# Altium PCB EEG_photoresistor.PcbDoc
Units mm, origin at the board's own origin, x right, y up, seen from the top; angles counter-clockwise.
Board outline 42.26 x 42.26 mm, 2 copper layers (Top Layer, Bottom Layer), stack 1.4 mm thick; 15 components, 8 nets, 46 pads, 0 vias.
Unrouted connection lines stored in the file: 2.
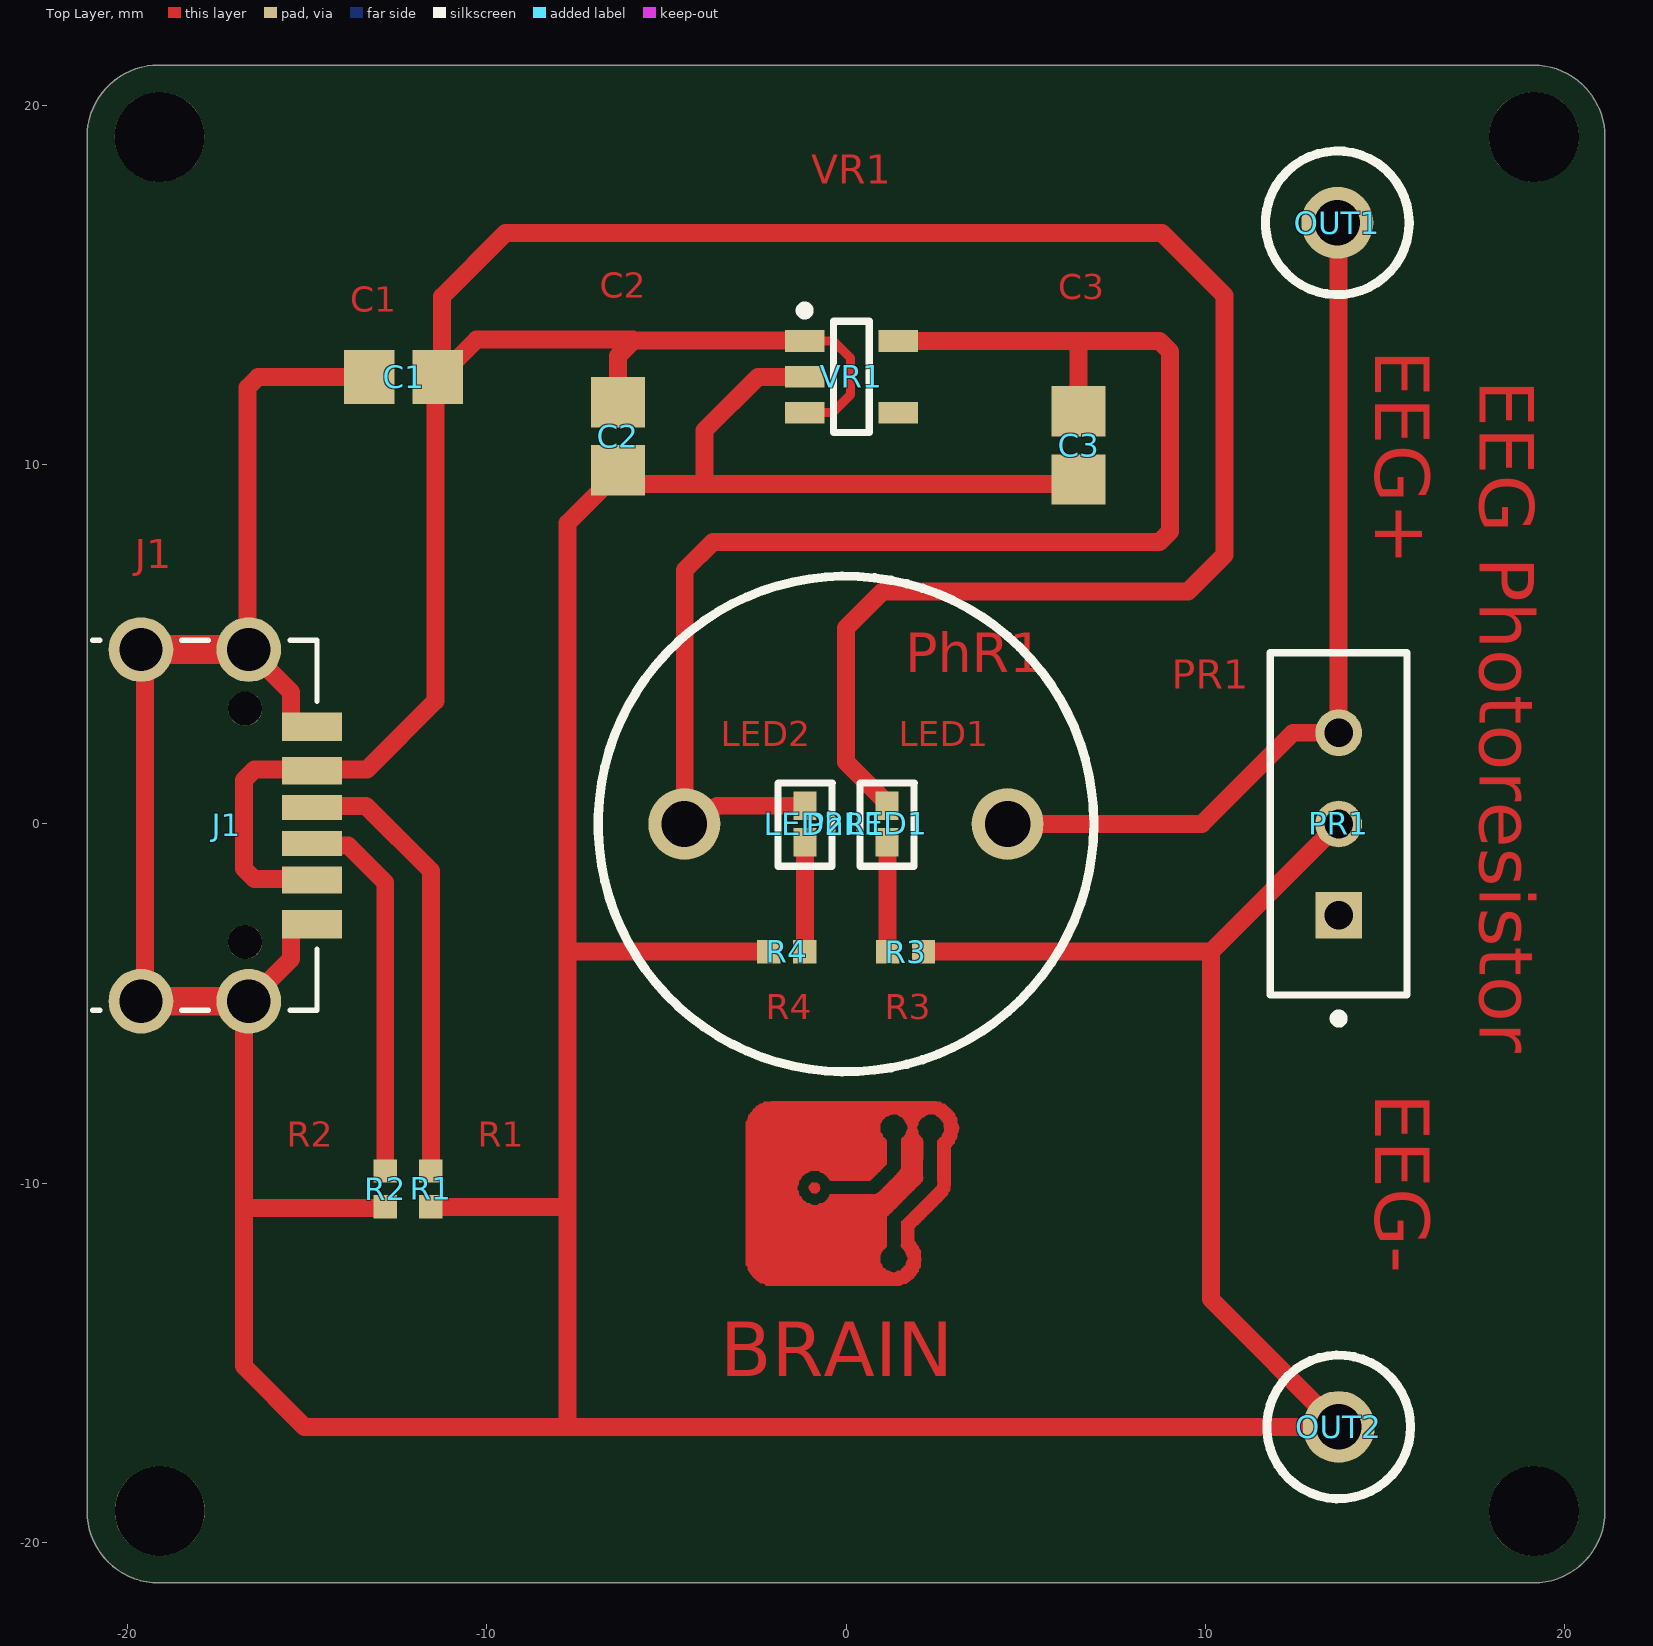
[diagram p0: Top Layer view]
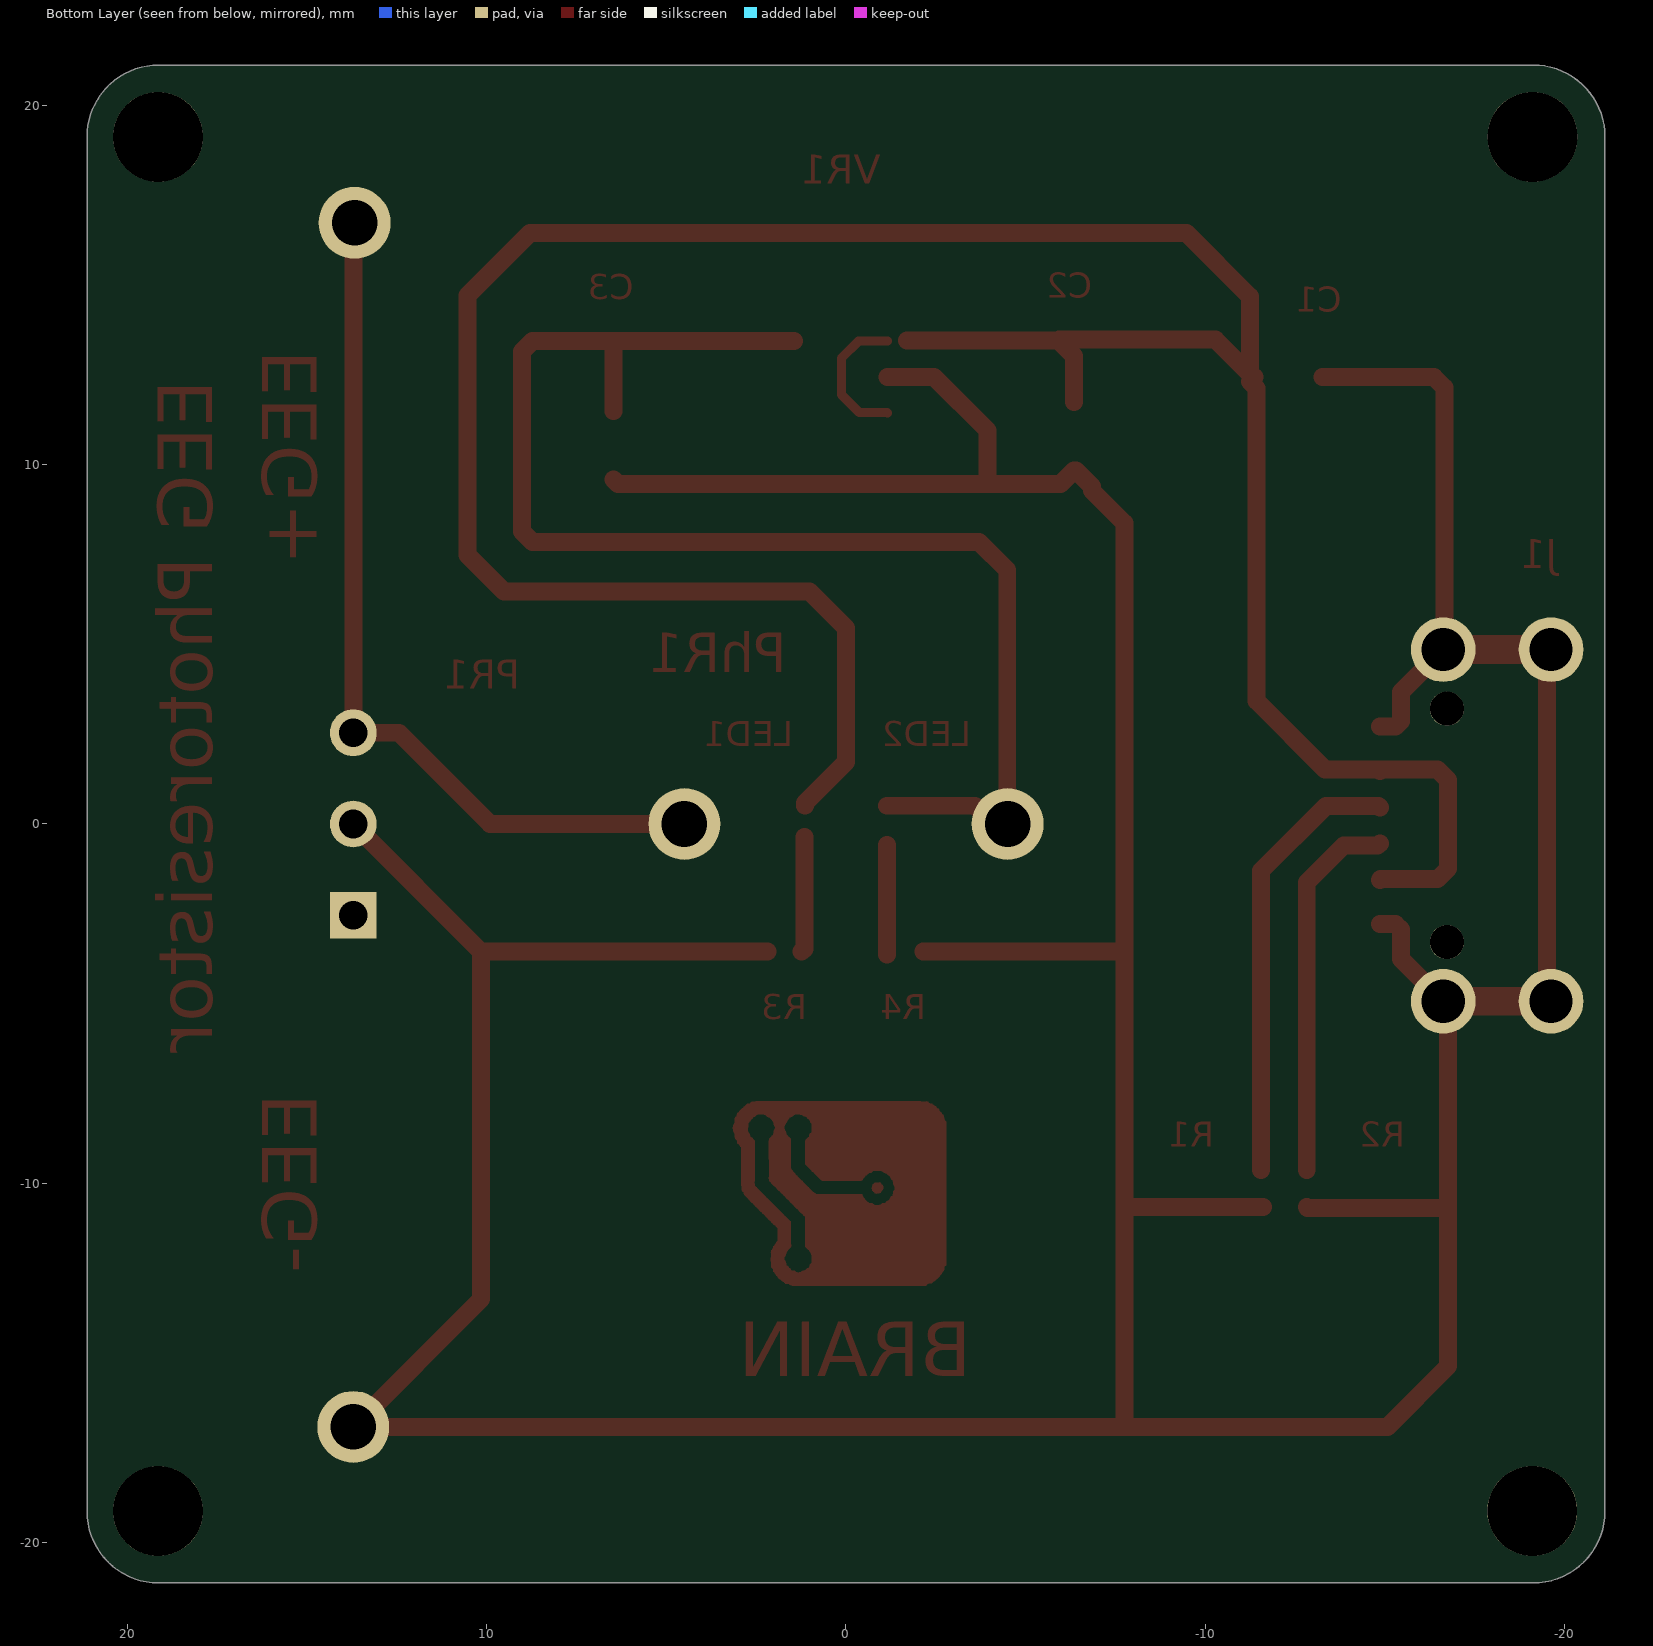
[diagram p1: Bottom Layer view, seen from below]

## Layer stack, top to bottom
Top Solder: solder mask 0.075, Solder Resist, Dk 3.5
Top Layer: signal copper 0.2
Dielectric 1: dielectric 1, FR-4, Dk 4.8
Bottom Layer: signal copper 0.2
Bottom Solder: solder mask 0.075, Solder Resist, Dk 3.5

## Board outline
-19.126,-21.13 19.131,-21.13 ccw(c19.131,-19.131) 21.13,-19.131 21.13,19.119 ccw(c19.13,19.13) 19.13,21.13 -19.13,21.13 ccw(c-19.131,19.13) -21.13,19.13 -21.13,-19.126 ccw(c-19.126,-19.126)

## Design rules (kind name [scope] priority, off if disabled: settings)
Clearance Clearance_1 [All] p1: gap=0.254 ignorepadtopadclearanceinfootprint=FALSE
Clearance Clearance_2 [All] p2: gap=0.254 ignorepadtopadclearanceinfootprint=FALSE
Clearance [All] p3: gap=0.254 ignorepadtopadclearanceinfootprint=FALSE ismatrix=TRUE
PolygonConnect [All] p1: connectstyle=Relief reliefconductorwidth=0.254 reliefentries=4 polygonreliefangle="90 Angle" airgapwidth=0.254
RoutingVias [All] p1: holewidth=0.711 width=1.27 viastyle="Through Hole" minholewidth=0.711 minwidth=1.27 maxholewidth=0.711 maxwidth=1.27
SolderMaskExpansion [All] p1: expansion=0.102 istentingtop=FALSE
Width Width_1 [All] p1: maxlimit=0.254 minlimit=0.254 preferedwidth=0.254
30 further rules are at their usual default settings.

## Components (designator, comment, footprint, x,y, rotation, side; value= is the part's Value field where it differs from the comment)
C1 "1uF" MURA-0805_H_1.35_M -12.319,12.446 r0 top
C2 "10uF" MURA-0805_H_1.35_M -6.35,10.795 r90 top
C3 "10uF" MURA-0805_H_1.35_M 6.477,10.541 r90 top
J1 "2171760001" NEW -21.128,-0.04 r270 top
LED1 "Red" LEDC1005X35N 1.143,0 r90 top
LED2 "Green" LEDC1005X35N -1.143,0 r90 top
OUT1 "EEG+" VoutPad 13.679,16.736 r0 top
OUT2 "GND" VoutPad 13.716,-16.785 r0 top
PhR1 "PGM1201-MP" PGM1201-MP 0,0 r0 top
PR1 "3290W-1-203" BOUR-3290W 13.716,0 r90 top
R1 "5.1KOhm" RESC1005X40X25ML05T05 -11.557,-10.16 r270 top
R2 "5.1KOhm" RESC1005X40X25ML05T05 -12.827,-10.16 r90 top
R3 "330Ohm" RESC1005X40X25ML05T05 1.659,-3.556 r180 top
R4 "22Ohm" RESC1005X40X25ML05T05 -1.651,-3.556 r0 top
VR1 "LP5907MFX-3.3" LP5907MFX-3.3 0.148,12.446 r0 top

## Footprints (in the part's own frame and the unit in brackets; to place one, negate y for a bottom-side part, rotate by r counter-clockwise, add the part's x,y. Pads: shape width x height; smd on the part's side, far side on the other; paste and mask are expansions set on the pad)
BOUR-3290W [mm] "THD, 3-Leads, Body 9.53x3.81mm, Pitch 2.54mm"
  rect 1.3x1.3 hole 0.8: 1(-2.54,0)
  round 1.3 hole 0.8: 2(0,0) 3(2.54,0)
  silkscreen extent -5.54,-1.91 4.76,1.91, body extent -4.89,-2.01 4.89,2.01, height 10.86
LEDC1005X35N [mm]
  rect 0.8x0.65 smd: 1(-0.508,0) 2(0.508,0)
  silkscreen extent -1.17,-0.76 1.14,0.75, body extent -0.5,-0.25 0.5,0.25, height 0.35
LP5907MFX-3.3 [mm] "SOT23, 5-Leads, Body 2,90x2,80mm, Pitch 1,00mm, IPC Medium Density"
  rect 1.1x0.6 smd: EN(-1.3,-1) GND(-1.3,0) IN(-1.3,1) N/C(1.3,-1) OUT(1.3,1)
  silkscreen extent -1.42,-1.55 0.5,1.97, body extent -1.5,-1.53 1.5,1.53, height 1.45
MURA-0805_H_1.35_M [mm] "SMD, 2-Leads, Body 2.1x1.35mm, IPC Low Density"
  rect 1.4x1.5 smd: 1(-0.95,0) 2(0.95,0)
  body extent -1.05,-0.67 1.05,0.67, height 1.35
NEW [mm]
  rect 0.8x1.67 smd mask+0.064: C1(-2.75,6.265) C6(2.75,6.265)
  rect 0.76x1.67 smd mask+0.064: C2(-1.52,6.265) C5(1.52,6.265)
  rect 0.7x1.67 smd mask+0.064: C3(-0.5,6.265) C4(0.5,6.265)
  round 1.8 hole 1.2 mask+0.064: SH1(-4.895,4.5) SH2(4.895,4.5) SH3(-4.895,1.5) SH4(4.895,1.5)
  round 0.95 hole 0.95 mask+0.064: ""(-3.25,4.4) ""(3.25,4.4)
  silkscreen extent -5.15,0.15 5.15,6.4, body extent -5.32,-2.02 5.32,6.73, height 4.81
PGM1201-MP [mm]
  round 2 hole 1.27: 1(-4.5,0) 2(4.5,0)
  silkscreen extent -6.9,-6.9 6.9,6.9, body extent -6.9,-6.89 6.9,6.89, height 22.35
RESC1005X40X25ML05T05 [mm] "Chip Resistor, 2-Leads, Body 1.00x0.50mm, IPC Low Density"
  rect 0.65x0.65 smd: 1(-0.5,0) 2(0.5,0)
  body extent -0.53,-0.27 0.53,0.28, height 0.4
VoutPad [mm]
  round 2 hole 1.27: Vout(0,0)
  silkscreen extent -2,-2 2,2

## Part data
C1: library part CMP-2000-05254-1, "CAP, Ceramic, 10 uF, 10%, 10 V, 0805, RoHS, Tape and Reel", Capacitance=1µF, Manufacturer=Murata, Manufacturer Number=GRM21BR61A106KE19L, Operating Temperature=-55degC~85degC, Package / Case=0805(2012Metric), Package Description="2-Pin Surface Mount Device (0805), Body 2.1 x 1.35 mm", Package Reference=805, Ratings=-, Standard Package=1, Temperature Coefficient=X5R, Tolerance=±10%, Voltage - Rated=10V, Applications=GeneralPurpose, Catalog Drawings=GRMSeries_0805_1.25, Category=Capacitors, Datasheet URL=https://datasheet.ciiva.com/3777/210grm21br61a106ke1923-3777175.pdf, Datasheet Version=Aug-14, Family=CeramicCapacitors, Featured Product=GA3SafetyRecognizedCapsandHi-CapMLCC, Features=-, Height - Seated (Max)=-, Lead Spacing=-, Lead Style=-, Manufacturer URL=http://www.murata.com/, Mounting Type=SurfaceMount,MLCC, Online Catalog=GRMSeries, Other Names=490-1709-6, Packaging=Digi-Reel, Product Training Modules=High-CapMultilayerCeramicCapacitors, Series=GRM, Size / Dimension="0.079\"Lx0.049\"W(2.00mmx1.25mm)", Thickness (Max)="0.053\"(1.35mm)"
C2 C3: library part CMP-2000-05254-1, "CAP, Ceramic, 10 uF, 10%, 10 V, 0805, RoHS, Tape and Reel", Capacitance=10µF, Manufacturer=Murata, Manufacturer Number=GRM21BR61A106KE19L, Operating Temperature=-55degC~85degC, Package / Case=0805(2012Metric), Package Description="2-Pin Surface Mount Device (0805), Body 2.1 x 1.35 mm", Package Reference=805, Ratings=-, Standard Package=1, Temperature Coefficient=X5R, Tolerance=±10%, Voltage - Rated=10V, Applications=GeneralPurpose, Catalog Drawings=GRMSeries_0805_1.25, Category=Capacitors, Datasheet URL=https://datasheet.ciiva.com/3777/210grm21br61a106ke1923-3777175.pdf, Datasheet Version=Aug-14, Family=CeramicCapacitors, Featured Product=GA3SafetyRecognizedCapsandHi-CapMLCC, Features=-, Height - Seated (Max)=-, Lead Spacing=-, Lead Style=-, Manufacturer URL=http://www.murata.com/, Mounting Type=SurfaceMount,MLCC, Online Catalog=GRMSeries, Other Names=490-1709-6, Packaging=Digi-Reel, Product Training Modules=High-CapMultilayerCeramicCapacitors, Series=GRM, Size / Dimension="0.079\"Lx0.049\"W(2.00mmx1.25mm)", Thickness (Max)="0.053\"(1.35mm)"
J1: "USB-C (USB TYPE-C) - Receptacle Connector 24 (6+18 Dummy) Position Surface Mount, Right Angle; Through Hole", Package=None, Check_prices=https://www.snapeda.com/parts/2171760001/Molex/view-part/?ref=eda, MF=Molex, MP=2171760001, SnapEDA_Link=https://www.snapeda.com/parts/2171760001/Molex/view-part/?ref=snap
LED1 LED2: library part LTST-C281KGKT, "LED", Manufacturer_Name=Lite-On, Mouser Part Number=859-LTST-C281KGKT, Arrow Part Number=LTST-C281KGKT, Arrow Price/Stock=https://www.arrow.com/en/products/ltst-c281kgkt/lite-on-technology?region=nac, Datasheet link=https://datasheet.lcsc.com/szlcsc/Lite-On-LTST-C281KGKT_C160479.pdf, Height=0.35mm, Manufacturer_Part_Number=LTST-C281KGKT, Mouser Price/Stock=https://www.mouser.co.uk/ProductDetail/Lite-On/LTST-C281KGKT?qs=xb8aMrBSZRJ6%2FVAKgwiAkw%3D%3D
OUT1 OUT2: library part Vout
PhR1: "Photoresistor; 250mW; 4÷10kΩ; 560nm; THT; 250VDC; ØLED: 12mm", Manufacturer=Token, Datasheet link=https://www.datasheets.com/part-details/pgm1201-mp-token-electronics-industry-co---ltd-425268427#package, Manufacturer part number=PGM1201-MP
PR1: library part CMP-2000-05581-1, "Trimming Potentiometer, 20 KOhm, 1 W, -65 to 150 degC, 3-Pin THD, RoHS, Tube", Manufacturer=Bourns, Package Description="3-Pin Through Hole Device, Body 9.53 x 3.81 mm, Pitch 2.54 mm", Package Reference=3290W, Power Rating=1W, Resistance Tolerance=±5%, Temperature Coefficient=±50ppm/°C, Track Resistance=20kohm, Datasheet URL=http://www.bourns.com/docs/Product-Datasheets/3290.pdf, Datasheet Version=04/2014, Manufacturer URL=http://www.bourns.com/, Mounting Technology=ThroughHole, No. of Turns=25, Potentiometer Mounting=ThroughHole, Product Range=AEC-Q2003290WSeries, SVHC=NoSVHC(15-Jun-2015)
R1 R2 R3 R4: library part CMP-2002-00515-1, "Chip Resistor, 330 Ohm, +/- 5%, 100 mW, -55 to 155 degC, 0402 (1005 Metric), RoHS, Tape and Reel", Manufacturer=Panasonic, Part Number=ERJ-2GEJ331X
VR1: "250-mA Ultra-Low-Noise, Low-IQ LDO", Manufacturer="Texas Instruments", Manufacturer part number=LP5907MFX-3.3/NOPB, Supplier Part Number 1=595-LP5907MFX-3.3NPB, Supplier 1=Mouser

## Free pads (board coordinates)
  round 2.5 hole 2.5: 1(-19.109,19.13) 2(19.151,19.13) 3(19.151,-19.13) 4(-19.105,-19.128)

## Nets (pads, with @x,y where several pads share a name; then routed paths per layer and width w, separated by ;. In a path a pad name is that pad's centre, name@x,y a point inside that pad or via, vN(x,y) a via of type N, cw(c..) or ccw(c..) an arc to the next point about the centre after c; other vN are vias at no path point)
GND: C1.1 C2.1 C3.1 J1.C1 J1.C6 J1.SH1 J1.SH2 J1.SH3 J1.SH4 OUT2.Vout PR1.2 R1.2 R2.1 R3.1 R4.1 VR1.GND | length 160.8
  Top Layer w0.5: J1.SH4 -19.52,-4.827 -19.52,4.748 J1.SH3 ; J1.C6 -15.298,-2.79 -15.448,-2.94 -15.448,-3.755 J1.SH2 -16.764,-5.071 -16.764,-10.685 ; J1.C1 -15.298,2.71 -15.448,2.86 -15.448,3.675 J1.SH1 -16.657,4.884 -16.657,12.153 -16.364,12.446 C1.1 ; R2.1 -12.852,-10.685 -16.764,-10.685 ; R1.2 -11.606,-10.66 -11.614,-10.668 -7.747,-10.668 ; R4.1 -7.62,-3.556 -7.747,-3.429 ; VR1.GND -2.452,12.446 -3.937,10.961 -3.937,9.464 ; R3.1@2.184,-3.556 10.16,-3.556 ; C3.1 6.35,9.464 -3.937,9.464 ; PR1.2 10.16,-3.556 ; -16.764,-10.685 -16.764,-15.095 -15.074,-16.785 -7.747,-16.785 ; -7.747,-16.785 OUT2.Vout 10.16,-13.229 10.16,-3.556 ; -7.747,-16.785 -7.747,-10.668 ; -7.747,-10.668 -7.747,-3.429 ; -7.747,-3.429 -7.747,8.382 -6.85,9.279 -6.85,9.395 -6.4,9.845 C2.1 -6.193,9.687 -5.969,9.464 -3.937,9.464
  Top Layer w0.8: J1.SH4 J1.SH2 ; J1.SH3 J1.SH1
NetC1_2: C1.2 C2.2 J1.C2 J1.C5 LED1.2 VR1.EN VR1.IN | length 85.2
  Top Layer w0.25: -16.245,1.468 -16.214,1.499 ; -16.218,-1.538 -16.214,-1.541 ; VR1.EN VR1.EN@-1.141,11.457
  Top Layer w0.254: VR1.IN -0.352,13.446 0.127,12.967 0.127,11.957 -0.374,11.457 VR1.EN@-1.141,11.457
  Top Layer w0.5: J1.C5 -14.885,-1.538 -16.218,-1.538 -16.471,-1.538 -16.764,-1.245 -16.764,1.227 -16.471,1.52 -14.902,1.52 J1.C2 -14.823,1.52 -13.339,1.52 -11.43,3.429 -11.43,12.131 C1.2@-11.242,12.319 ; C1.2 -11.324,12.446 C1.2@-11.242,12.528 ; C2.2 -6.35,13.027 -5.916,13.462 ; VR1.IN@-1.693,13.462 -5.916,13.462 ; LED1.2 1.143,0.583 0,1.726 0,5.461 1.016,6.477 9.525,6.477 10.541,7.493 10.541,14.714 8.802,16.453 -9.476,16.453 -11.242,14.687 C1.2@-11.242,12.528 ; C1.2@-11.242,12.528 -10.287,13.483 -5.937,13.483 -5.916,13.462
NetC3_2: C3.2 LED2.2 PhR1.1 VR1.OUT | length 39.2
  Top Layer w0.5: PhR1.1 -4.094,0 -3.586,0.508 LED2.2 ; PhR1.1@-4.489,0.011 -4.489,7.068 -3.704,7.853 8.724,7.853 9.017,8.146 9.017,13.153 8.724,13.446 6.477,13.446 ; VR1.OUT 6.477,13.446 ; C3.2 6.477,13.446
NetJ1_C3: J1.C3 R1.1 | length 12.4
  Top Layer w0.5: J1.C3 -14.823,0.5 -13.359,0.5 -11.557,-1.302 R1.1@-11.557,-9.635
NetJ1_C4: J1.C4 R2.2 | length 10.5
  Top Layer w0.5: J1.C4 -14.802,-0.6 -13.858,-0.6 -12.827,-1.631 R2.2@-12.827,-9.635
NetLED1_1: LED1.1 R3.2 | length 3.2
  Top Layer w0.5: LED1.1@1.159,-0.358 1.159,-2.305 1.159,-3.481 R3.2@1.234,-3.556
NetLED2_1: LED2.1 R4.2 | length 3
  Top Layer w0.5: R4.2@-1.143,-3.638 LED2.1@-1.143,-0.59
NetOUT1_Vout: OUT1.Vout PhR1.2 PR1.3 | length 24.5
  Top Layer w0.5: PhR1.2 9.906,0 12.446,2.54 PR1.3 13.716,16.7 OUT1.Vout
pads on no net: J1. PR1.1 VR1.N/C

## Other copper
Top Layer:
  region: -0.723,-10.16 -0.729,-10.18 -0.736,-10.212 -0.752,-10.229 -0.765,-10.235 -0.801,-10.271 -0.804,-10.281 -0.837,-10.294 -0.932,-10.284 -0.964,-10.265 -0.971,-10.252 -1,-10.209 -1.013,-10.203 -1.036,-10.16 -1.043,-10.095 -1.03,-10.062 -1.02,-10.052 -1.007,-10.046 -0.984,-10.023 -0.977,-10.01 -0.961,-9.987 -0.935,-9.981 -0.804,-9.987 -0.768,-10.017 -0.749,-10.036 -0.742,-10.049 -0.729,-10.082 -0.723,-10.154
  region: 219 vertices and 2 holes, not listed, extent -2.792,-12.86 3.149,-7.715
  text "EEG+" at 14.732,13.208 h1.52 r270
  text "EEG Photoresistor" at 17.639,12.363 h1.52 r270
  text "EEG-" at 14.732,-7.493 h1.52 r270
  text "BRAIN" at -3.501,-15.375 h1.52

## Silkscreen, mask and mechanical layers (free items; w line width, h text height)
Top 3D Body:
  the board outline again, w0.5
Board Shape:

## Text inside footprints (layer, text, board x,y; h text height)
J1: Mechanical 13 "PCB Edge" at -20.878,-5.79 h1 r270